# Altium PCB dc_power_module_v1.PcbDoc (part 4 of 4)
Units mm, origin at the board's own origin, x right, y up, seen from the top; angles counter-clockwise.
Board outline 83.82 x 73.41 mm, 2 copper layers (Top Layer, Bottom Layer); 37 components, 20 nets, 131 pads, 21 vias.
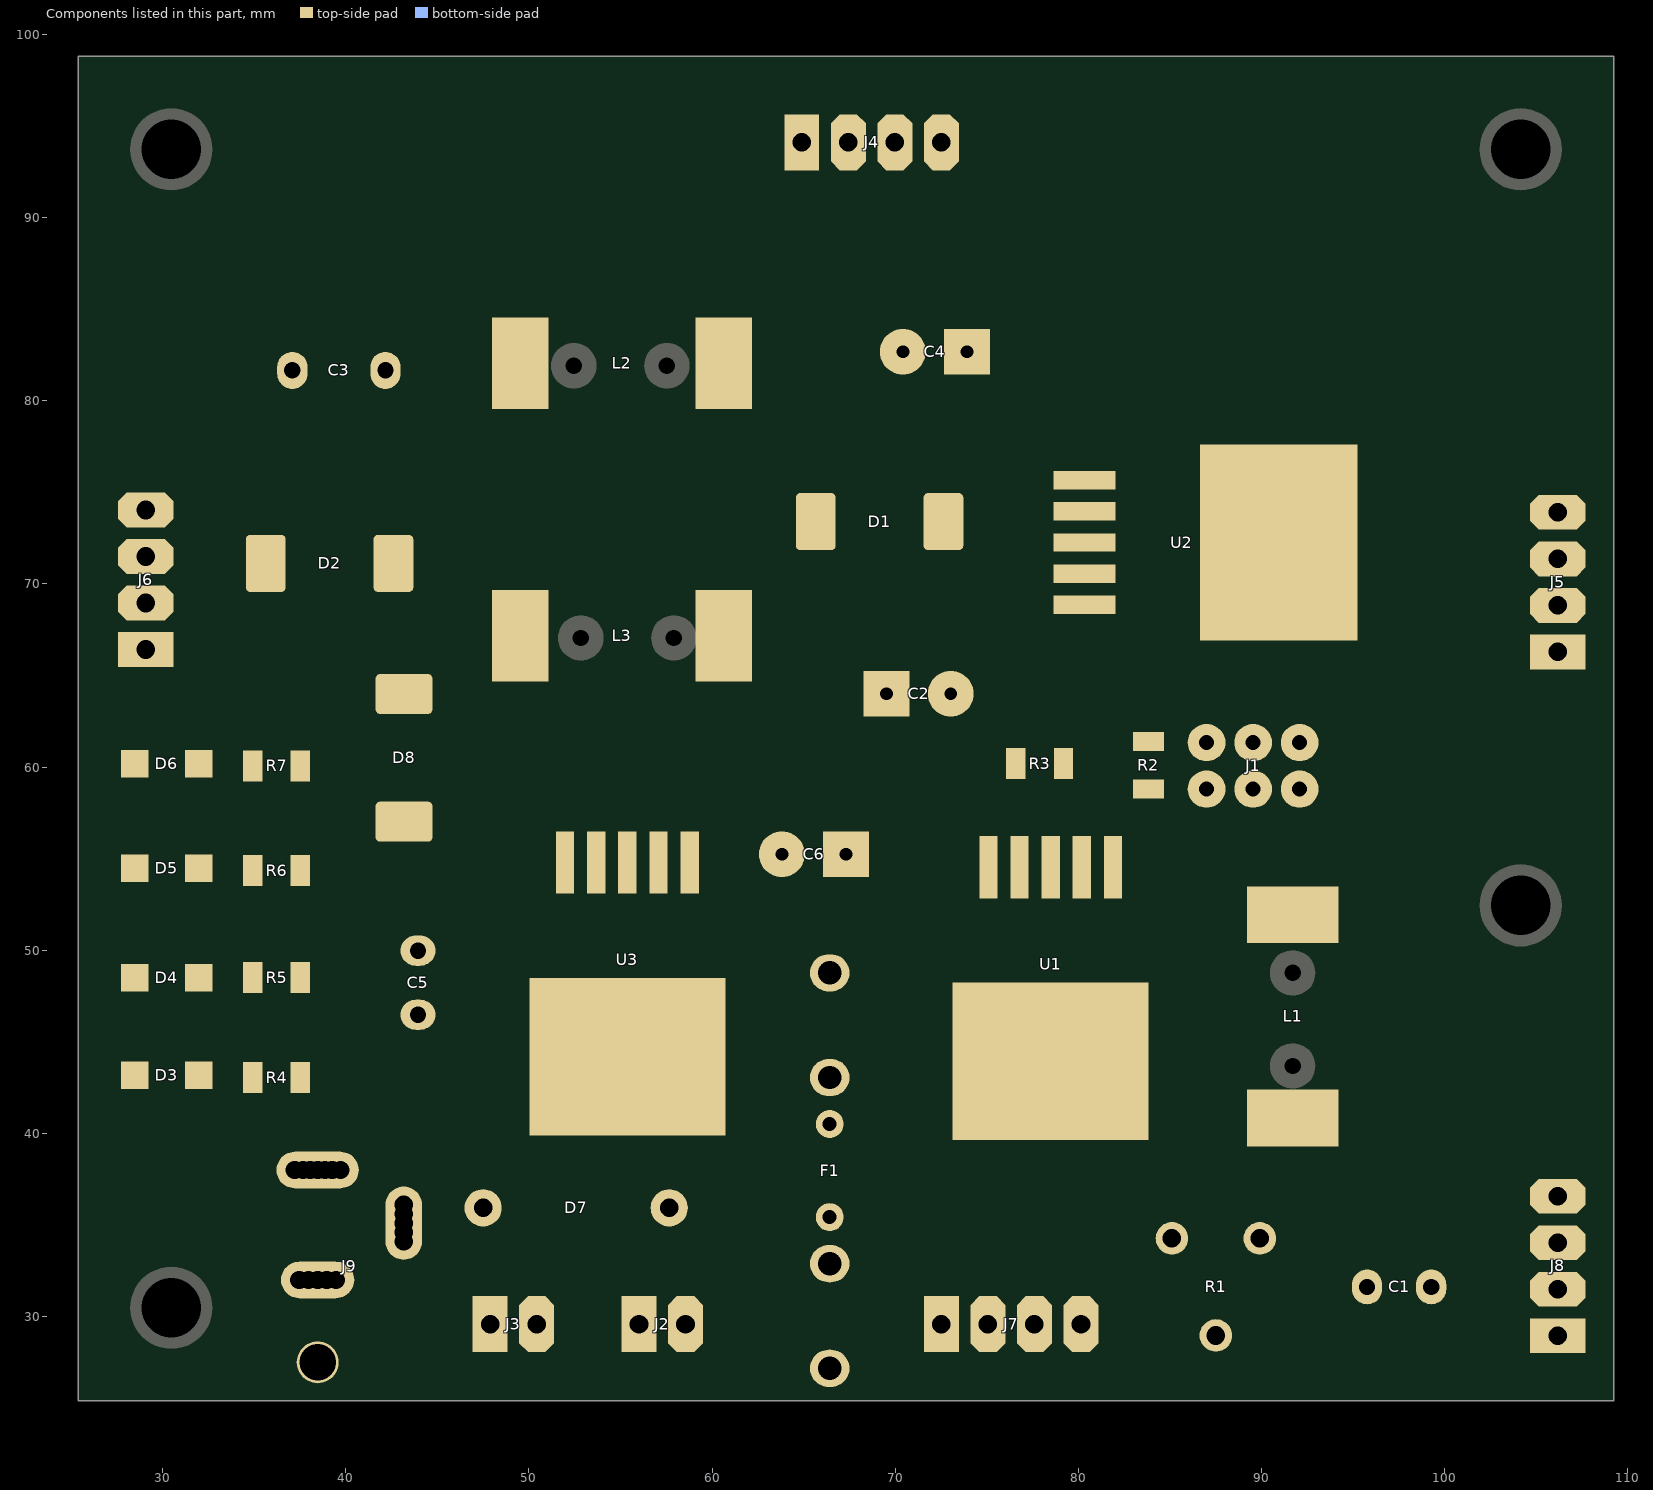
[diagram p4: the components of this part, seen from the top]

## Via types
v1: diameter 1.27, hole 0.711, Top Layer to Bottom Layer, 21 vias

## Nets (pads, with @x,y where several pads share a name; then routed paths per layer and width w, separated by ;. In a path a pad name is that pad's centre, name@x,y a point inside that pad or via, vN(x,y) a via of type N, cw(c..) or ccw(c..) an arc to the next point about the centre after c; other vN are vias at no path point) (continued)
copper on no net: (continued)
  Top Layer w0.008: 44.19,89.148 44.411,89.148 ; 44.19,90.062 44.411,90.062 ; 44.19,90.07 44.411,90.07 ; 44.19,90.077 44.411,90.077 ; 44.19,90.085 44.411,90.085 ; 44.19,90.093 44.411,90.093 ; 44.19,92.363 44.526,92.363 ; 44.19,95 44.266,95 ; 44.198,88.759 44.274,88.759 ; 44.198,89.087 44.404,89.087 ; 44.198,89.094 44.404,89.094 ; 44.198,89.102 44.404,89.102 ; 44.198,89.11 44.411,89.11 ; 44.198,89.155 44.411,89.155 ; 44.198,89.163 44.404,89.163 ; 44.198,89.171 44.404,89.171 ; 44.198,89.178 44.404,89.178 ; 44.198,90.032 44.404,90.032 ; 44.198,90.039 44.404,90.039 ; 44.198,90.047 44.404,90.047 ; 44.198,90.054 44.411,90.054 ; 44.198,90.1 44.411,90.1 ; 44.198,90.108 44.404,90.108 ; 44.198,90.115 44.404,90.115 ; 44.198,90.123 44.404,90.123 ; 44.198,95.007 44.282,95.007 ; 44.206,88.469 44.266,88.469 ; 44.206,88.477 44.266,88.477 ; 44.206,88.485 44.266,88.485 ; 44.206,88.492 44.266,88.492 ; 44.206,88.5 44.266,88.5 ; 44.206,88.729 44.266,88.729 ; 44.206,88.736 44.266,88.736 ; 44.206,88.744 44.266,88.744 ; 44.206,88.751 44.266,88.751 ; 44.206,89.079 44.396,89.079 ; 44.206,89.186 44.396,89.186 ; 44.206,89.193 44.396,89.193 ; 44.206,90.016 44.396,90.016 ; 44.206,90.024 44.396,90.024 ; 44.206,90.131 44.396,90.131 ; 44.206,92.371 44.541,92.371 ; 44.206,95.015 44.289,95.015 ; 44.213,88.508 44.266,88.508 ; 44.213,88.515 44.266,88.515 ; 44.213,88.523 44.266,88.523 ; 44.213,88.53 44.266,88.53 ; 44.213,88.538 44.266,88.538 ; 44.213,88.546 44.266,88.546 ; 44.213,88.553 44.266,88.553 ; 44.213,88.561 44.266,88.561 ; 44.213,88.569 44.266,88.569 ; 44.213,88.576 44.266,88.576 ; 44.213,88.584 44.266,88.584 ; 44.213,88.591 44.266,88.591 ; 44.213,88.599 44.266,88.599 ; 44.213,88.607 44.266,88.607 ; 44.213,88.614 44.266,88.614 ; 44.213,88.622 44.266,88.622 ; 44.213,88.629 44.266,88.629 ; 44.213,88.637 44.266,88.637 ; 44.213,88.645 44.266,88.645 ; 44.213,88.652 44.266,88.652 ; 44.213,88.66 44.266,88.66 ; 44.213,88.668 44.266,88.668 ; 44.213,88.675 44.266,88.675 ; 44.213,88.683 44.266,88.683 ; 44.213,88.69 44.266,88.69 ; 44.213,88.698 44.266,88.698 ; 44.213,88.706 44.266,88.706 ; 44.213,88.713 44.266,88.713 ; 44.213,88.721 44.266,88.721 ; 44.213,89.064 44.388,89.064 ; 44.213,89.071 44.388,89.071 ; 44.213,89.201 44.388,89.201 ; 44.213,90.009 44.388,90.009 ; 44.213,90.138 44.396,90.138 ; 44.213,90.146 44.388,90.146 ; 44.221,89.056 44.381,89.056 ; 44.221,89.209 44.381,89.209 ; 44.221,90.001 44.381,90.001 ; 44.221,90.153 44.381,90.153 ; 44.221,92.379 44.556,92.379 ; 44.221,95.023 44.297,95.023 ; 44.228,89.049 44.373,89.049 ; 44.228,89.216 44.373,89.216 ; 44.228,89.993 44.373,89.993 ; 44.228,90.161 44.373,90.161 ; 44.228,95.03 44.305,95.03 ; 44.236,89.224 44.366,89.224 ; 44.236,89.986 44.366,89.986 ; 44.236,95.038 44.312,95.038 ; 44.236,96.851 45.341,96.851 ; 44.244,89.041 44.358,89.041 ; 44.244,90.169 44.358,90.169 ; 44.244,92.386 44.571,92.386 ; 44.244,95.046 44.327,95.046 ; 44.251,89.231 44.35,89.231 ; 44.251,89.978 44.35,89.978 ; 44.251,90.176 44.35,90.176 ; 44.251,95.053 44.335,95.053 ; 44.259,89.033 44.35,89.033 ; 44.259,92.394 44.587,92.394 ; 44.259,95.061 44.343,95.061 ; 44.266,95.068 44.35,95.068 ; 44.274,89.239 44.327,89.239 ; 44.274,89.971 44.327,89.971 ; 44.274,92.401 44.602,92.401 ; 44.282,89.026 44.32,89.026 ; 44.282,90.184 44.32,90.184 ; 44.282,95.076 44.366,95.076 ; 44.282,96.844 45.356,96.844 ; 44.289,92.409 44.617,92.409 ; 44.289,95.084 44.373,95.084 ; 44.297,95.091 44.381,95.091 ; 44.305,92.417 44.625,92.417 ; 44.305,95.099 44.388,95.099 ; 44.312,95.106 44.396,95.106 ; 44.32,92.424 44.64,92.424 ; 44.32,95.114 44.411,95.114 ; 44.32,96.836 45.364,96.836 ; 44.327,95.122 44.419,95.122 ; 44.335,92.432 44.655,92.432 ; 44.343,95.129 44.427,95.129 ; 44.35,92.439 44.67,92.439 ; 44.35,95.137 44.434,95.137 ; 44.358,95.145 44.449,95.145 ; 44.358,96.829 45.379,96.829 ; 44.366,92.447 44.686,92.447 ; 44.366,95.152 44.457,95.152 ; 44.373,95.16 44.465,95.16 ; 44.381,92.455 44.701,92.455 ; 44.381,95.167 44.472,95.167 ; 44.388,92.462 44.708,92.462 ; 44.388,95.175 44.487,95.175 ; 44.396,95.183 44.495,95.183 ; 44.396,96.821 45.387,96.821 ; 44.404,92.47 44.724,92.47 ; 44.411,95.19 44.503,95.19 ; 44.419,92.478 44.739,92.478 ; 44.419,95.198 44.51,95.198 ; 44.427,95.206 44.518,95.206 ; 44.427,96.813 45.402,96.813 ; 44.434,92.485 44.747,92.485 ; 44.434,95.213 44.533,95.213 ; 44.442,95.221 44.541,95.221 ; 44.449,89.079 44.67,89.079 ; 44.449,90.131 44.67,90.131 ; 44.449,92.493 44.762,92.493 ; 44.449,95.228 44.548,95.228 ; 44.449,96.806 45.417,96.806 ; 44.457,89.041 44.663,89.041 ; 44.457,89.049 44.663,89.049 ; 44.457,89.056 44.67,89.056 ; 44.457,89.064 44.67,89.064 ; 44.457,89.071 44.67,89.071 ; 44.457,89.087 44.67,89.087 ; 44.457,89.094 44.67,89.094 ; 44.457,89.102 44.67,89.102 ; 44.457,89.11 44.67,89.11 ; 44.457,89.117 44.663,89.117 ; 44.457,89.125 44.663,89.125 ; 44.457,90.093 44.663,90.093 ; 44.457,90.1 44.67,90.1 ; 44.457,90.108 44.67,90.108 ; 44.457,90.115 44.67,90.115 ; 44.457,90.123 44.67,90.123 ; 44.457,90.138 44.67,90.138 ; 44.457,90.146 44.67,90.146 ; 44.457,90.153 44.67,90.153 ; 44.457,90.161 44.663,90.161 ; 44.457,90.169 44.663,90.169 ; 44.457,92.5 44.777,92.5 ; 44.457,95.236 44.556,95.236 ; 44.465,89.026 44.655,89.026 ; 44.465,89.033 44.663,89.033 ; 44.465,89.132 44.663,89.132 ; 44.465,90.077 44.655,90.077 ; 44.465,90.085 44.663,90.085 ; 44.465,90.176 44.663,90.176 ; 44.465,90.184 44.655,90.184 ; 44.472,89.018 44.655,89.018 ; 44.472,89.14 44.655,89.14 ; 44.472,89.148 44.647,89.148 ; 44.472,90.062 44.647,90.062 ; 44.472,90.07 44.655,90.07 ; 44.472,90.192 44.655,90.192 ; 44.472,92.508 44.785,92.508 ; 44.472,95.244 44.571,95.244 ; 44.48,89.01 44.647,89.01 ; 44.48,89.155 44.64,89.155 ; 44.48,90.054 44.64,90.054 ; 44.48,90.199 44.647,90.199 ; 44.48,95.251 44.579,95.251 ; 44.48,96.798 45.425,96.798 ; 44.487,89.003 44.64,89.003 ; 44.487,89.163 44.632,89.163 ; 44.487,90.047 44.632,90.047 ; 44.487,90.207 44.64,90.207 ; 44.487,92.516 44.8,92.516 ; 44.487,95.259 44.587,95.259 ; 44.495,88.995 44.632,88.995 ; 44.495,89.171 44.625,89.171 ; 44.495,90.039 44.625,90.039 ; 44.495,90.214 44.632,90.214 ; 44.495,92.523 44.815,92.523 ; 44.495,95.267 44.594,95.267 ; 44.503,88.988 44.617,88.988 ; 44.503,90.222 44.617,90.222 ; 44.503,95.274 44.602,95.274 ; 44.503,96.791 45.44,96.791 ; 44.51,89.178 44.617,89.178 ; 44.51,90.032 44.609,90.032 ; 44.51,92.531 44.823,92.531 ; 44.51,95.282 44.617,95.282 ; 44.518,88.98 44.602,88.98 ; 44.518,90.23 44.609,90.23 ; 44.518,95.289 44.625,95.289 ; 44.526,89.186 44.594,89.186 ; 44.526,92.539 44.838,92.539 ; 44.533,90.024 44.594,90.024 ; 44.533,92.546 44.846,92.546 ; 44.533,95.297 44.632,95.297 ; 44.533,96.783 45.448,96.783 ; 44.541,88.561 44.609,88.561 ; 44.541,88.569 44.609,88.569 ; 44.541,88.576 44.602,88.576 ; 44.541,88.584 44.602,88.584 ; 44.541,88.591 44.602,88.591 ; 44.541,88.599 44.602,88.599 ; 44.541,88.607 44.602,88.607 ; 44.541,88.614 44.602,88.614 ; 44.541,88.622 44.602,88.622 ; 44.541,88.629 44.602,88.629 ; 44.541,88.637 44.602,88.637 ; 44.541,88.645 44.609,88.645 ; 44.541,88.652 44.609,88.652 ; 44.541,95.305 44.64,95.305 ; 44.548,88.538 44.617,88.538 ; 44.548,88.546 44.609,88.546 ; 44.548,88.553 44.609,88.553 ; 44.548,88.66 44.609,88.66 ; 44.548,88.668 44.609,88.668 ; 44.548,88.675 44.609,88.675 ; 44.548,88.683 44.617,88.683 ; 44.548,90.237 44.579,90.237 ; 44.548,92.554 44.861,92.554 ; 44.548,95.312 44.655,95.312 ; 44.556,88.523 44.617,88.523 ; 44.556,88.53 44.617,88.53 ; 44.556,88.69 44.617,88.69 ; 44.556,88.698 44.617,88.698 ; 44.556,92.561 44.868,92.561 ; 44.556,95.32 44.663,95.32 ; 44.556,96.775 45.463,96.775 ; 44.564,88.508 44.632,88.508 ; 44.564,88.515 44.625,88.515 ; 44.564,88.706 44.625,88.706 ; 44.564,88.713 44.625,88.713 ; 44.564,95.327 44.67,95.327 ; 44.571,88.492 44.64,88.492 ; 44.571,88.5 44.632,88.5 ; 44.571,88.721 44.632,88.721 ; 44.571,92.569 44.884,92.569 ; 44.571,95.335 44.678,95.335 ; 44.579,88.485 44.655,88.485 ; 44.579,88.729 44.64,88.729 ; 44.579,95.343 44.693,95.343 ; 44.579,96.768 45.47,96.768 ; 44.587,88.477 44.663,88.477 ; 44.587,88.736 44.64,88.736 ; 44.587,92.577 44.891,92.577 ; 44.594,88.469 44.678,88.469 ; 44.594,88.744 44.647,88.744 ; 44.594,92.584 44.907,92.584 ; 44.594,95.35 44.701,95.35 ; 44.594,96.76 45.486,96.76 ; 44.602,88.751 44.663,88.751 ; 44.602,95.358 44.708,95.358 ; 44.609,88.759 44.678,88.759 ; 44.609,92.592 44.914,92.592 ; 44.609,95.366 44.716,95.366 ; 44.617,88.767 44.708,88.767 ; 44.617,92.6 44.929,92.6 ; 44.617,95.373 44.724,95.373 ; 44.617,96.752 45.493,96.752 ; 44.625,95.381 44.739,95.381 ; 44.632,88.774 44.792,88.774 ; 44.632,92.607 44.937,92.607 ; 44.632,95.388 44.747,95.388 ; 44.64,92.615 44.952,92.615 ; 44.64,95.396 44.754,95.396 ; 44.64,96.745 45.501,96.745 ; 44.647,88.782 44.769,88.782 ; 44.655,92.622 44.96,92.622 ; 44.655,95.404 44.762,95.404 ; 44.655,96.737 45.516,96.737 ; 44.663,92.63 44.975,92.63 ; 44.663,95.411 44.777,95.411 ; 44.67,95.419 44.785,95.419 ; 44.678,88.79 44.747,88.79 ; 44.678,92.638 44.983,92.638 ; 44.678,95.427 44.792,95.427 ; 44.678,96.73 45.524,96.73 ; 44.686,92.645 44.99,92.645 ; 44.686,95.434 44.8,95.434 ; 44.693,92.653 45.006,92.653 ; 44.693,95.442 44.808,95.442 ; 44.693,96.722 45.531,96.722 ; 44.701,95.449 44.823,95.449 ; 44.708,92.66 45.013,92.66 ; 44.716,88.98 44.838,88.98 ; 44.716,88.988 44.876,88.988 ; 44.716,88.995 44.914,88.995 ; 44.716,89.003 44.945,89.003 ; 44.716,89.01 44.968,89.01 ; 44.716,89.018 44.99,89.018 ; 44.716,89.026 45.013,89.026 ; 44.716,89.033 45.028,89.033 ; 44.716,89.041 45.051,89.041 ; 44.716,89.049 45.067,89.049 ; 44.716,89.056 45.082,89.056 ; 44.716,89.064 45.097,89.064 ; 44.716,89.071 45.112,89.071 ; 44.716,89.079 45.128,89.079 ; 44.716,89.087 45.135,89.087 ; 44.716,89.094 45.15,89.094 ; 44.716,89.102 45.166,89.102 ; 44.716,89.11 45.173,89.11 ; 44.716,89.117 45.189,89.117 ; 44.716,89.125 45.196,89.125 ; 44.716,89.132 45.204,89.132 ; 44.716,89.14 45.219,89.14 ; 44.716,89.148 45.227,89.148 ; 44.716,89.155 45.234,89.155 ; 44.716,89.163 45.242,89.163 ; 44.716,89.171 45.249,89.171 ; 44.716,89.178 45.257,89.178 ; 44.716,89.186 45.265,89.186 ; 44.716,90.024 45.272,90.024 ; 44.716,90.032 45.265,90.032 ; 44.716,90.039 45.257,90.039 ; 44.716,90.047 45.242,90.047 ; 44.716,90.054 45.234,90.054 ; 44.716,90.062 45.227,90.062 ; 44.716,90.07 45.219,90.07 ; 44.716,90.077 45.211,90.077 ; 44.716,90.085 45.196,90.085 ; 44.716,90.093 45.189,90.093 ; 44.716,90.1 45.173,90.1 ; 44.716,90.108 45.166,90.108 ; 44.716,90.115 45.15,90.115 ; 44.716,90.123 45.143,90.123 ; 44.716,90.131 45.128,90.131 ; 44.716,90.138 45.112,90.138 ; 44.716,90.146 45.097,90.146 ; 44.716,90.153 45.082,90.153 ; 44.716,90.161 45.067,90.161 ; 44.716,90.169 45.051,90.169 ; 44.716,90.176 45.036,90.176 ; 44.716,90.184 45.013,90.184 ; 44.716,90.192 44.998,90.192 ; 44.716,90.199 44.975,90.199 ; 44.716,90.207 44.952,90.207 ; 44.716,90.214 44.922,90.214 ; 44.716,90.222 44.884,90.222 ; 44.716,90.23 44.846,90.23 ; 44.716,90.237 44.769,90.237 ; 44.716,92.668 45.021,92.668 ; 44.716,95.457 44.83,95.457 ; 44.716,96.714 45.547,96.714 ; 44.724,88.767 44.83,88.767 ; 44.724,95.465 44.838,95.465 ; 44.731,92.676 45.036,92.676 ; 44.731,95.472 44.846,95.472 ; 44.731,96.707 45.554,96.707 ; 44.739,92.683 45.044,92.683 ; 44.739,95.48 44.861,95.48 ; 44.747,92.691 45.051,92.691 ; 44.747,95.487 44.868,95.487 ; 44.747,96.699 45.562,96.699 ; 44.754,88.759 44.838,88.759 ; 44.754,95.495 44.876,95.495 ; 44.762,89.193 45.272,89.193 ; 44.762,92.699 45.067,92.699 ; 44.762,95.503 44.884,95.503 ; 44.762,96.691 45.57,96.691 ; 44.769,88.469 44.808,88.469 ; 44.769,88.751 44.838,88.751 ; 44.769,92.706 45.074,92.706 ; 44.777,90.016 45.28,90.016 ; 44.777,95.51 44.899,95.51 ; 44.785,88.477 44.815,88.477 ; 44.785,88.744 44.838,88.744 ; 44.785,92.714 45.082,92.714 ; 44.785,95.518 44.907,95.518 ; 44.785,96.684 45.585,96.684 ; 44.792,88.485 44.823,88.485 ; 44.792,88.736 44.838,88.736 ; 44.792,92.721 45.097,92.721 ; 44.792,95.526 44.914,95.526 ; 44.8,88.492 44.83,88.492 ; 44.8,88.721 44.838,88.721 ; 44.8,88.729 44.838,88.729 ; 44.8,92.729 45.105,92.729 ; 44.8,95.533 44.922,95.533 ; 44.8,96.676 45.592,96.676 ; 44.808,88.5 44.838,88.5 ; 44.808,88.706 44.838,88.706 ; 44.808,88.713 44.838,88.713 ; 44.808,88.774 44.83,88.774 ; 44.808,95.541 44.929,95.541 ; 44.815,88.508 44.838,88.508 ; 44.815,88.69 44.838,88.69 ; 44.815,88.698 44.838,88.698 ; 44.815,88.782 44.83,88.782 ; 44.815,88.79 44.83,88.79 ; 44.815,89.201 45.28,89.201 ; 44.815,92.737 45.112,92.737 ; 44.815,95.548 44.945,95.548 ; 44.815,96.669 45.6,96.669 ; 44.823,88.515 44.846,88.515 ; 44.823,88.523 44.846,88.523 ; 44.823,88.675 44.838,88.675 ; 44.823,88.683 44.838,88.683 ; 44.823,92.744 45.12,92.744 ; 44.823,95.556 44.952,95.556 ; 44.83,88.53 44.838,88.53 ; 44.83,90.009 45.288,90.009 ; 44.83,92.752 45.135,92.752 ; 44.83,95.564 44.96,95.564 ; 44.83,96.661 45.608,96.661 ; 44.838,92.76 45.143,92.76 ; 44.846,95.571 44.968,95.571 ; 44.846,96.653 45.615,96.653 ; 44.853,89.209 45.288,89.209 ; 44.853,92.767 45.15,92.767 ; 44.853,95.579 44.983,95.579 ; 44.861,90.001 45.295,90.001 ; 44.861,92.775 45.158,92.775 ; 44.861,95.587 44.99,95.587 ; 44.861,96.646 45.623,96.646 ; 44.868,92.782 45.166,92.782 ; 44.868,95.594 44.998,95.594 ; 44.868,96.638 45.638,96.638 ; 44.876,95.602 45.006,95.602 ; 44.884,89.216 45.295,89.216 ; 44.884,89.993 45.303,89.993 ; 44.884,92.79 45.181,92.79 ; 44.884,95.609 45.013,95.609 ; 44.884,96.63 45.646,96.63 ; 44.891,92.798 45.189,92.798 ; 44.891,95.617 45.028,95.617 ; 44.899,92.805 45.196,92.805 ; 44.899,96.623 45.653,96.623 ; 44.907,89.224 45.303,89.224 ; 44.907,89.986 45.303,89.986 ; 44.907,92.813 45.204,92.813 ; 44.907,95.625 45.036,95.625 ; 44.914,92.82 45.211,92.82 ; 44.914,95.632 45.044,95.632 ; 44.914,96.615 45.661,96.615 ; 44.922,89.231 45.31,89.231 ; 44.922,95.64 45.051,95.64 ; 44.929,89.978 45.31,89.978 ; 44.929,92.828 45.227,92.828 ; 44.929,95.648 45.067,95.648 ; 44.929,96.608 45.669,96.608 ; 44.937,92.836 45.234,92.836 ; 44.937,95.655 45.074,95.655 ; 44.945,89.239 45.318,89.239 ; 44.945,92.843 45.242,92.843 ; 44.945,95.663 45.082,95.663 ; 44.945,96.6 45.676,96.6 ; 44.952,89.971 45.318,89.971 ; 44.952,92.851 45.249,92.851 ; 44.952,95.67 45.089,95.67 ; 44.952,96.592 45.684,96.592 ; 44.96,89.247 45.326,89.247 ; 44.96,92.859 45.257,92.859 ; 44.968,89.963 45.326,89.963 ; 44.968,95.678 45.105,95.678 ; 44.968,96.585 45.691,96.585 ; 44.975,89.254 45.326,89.254 ; 44.975,92.866 45.265,92.866 ; 44.975,95.686 45.112,95.686 ; 44.983,89.955 45.333,89.955 ; 44.983,92.874 45.272,92.874 ; 44.983,95.693 45.12,95.693 ; 44.983,96.577 45.699,96.577 ; 44.99,89.262 45.333,89.262 ; 44.99,92.881 45.28,92.881 ; 44.99,95.701 45.128,95.701 ; 44.99,96.57 45.707,96.57 ; 44.998,89.948 45.333,89.948 ; 44.998,92.889 45.288,92.889 ; 44.998,95.708 45.135,95.708 ; 45.006,89.27 45.341,89.27 ; 45.006,92.897 45.303,92.897 ; 45.006,95.716 45.15,95.716 ; 45.006,96.562 45.714,96.562 ; 45.013,89.94 45.341,89.94 ; 45.013,92.904 45.31,92.904 ; 45.013,95.724 45.158,95.724 ; 45.021,89.277 45.349,89.277 ; 45.021,89.933 45.349,89.933 ; 45.021,92.912 45.318,92.912 ; 45.021,96.554 45.722,96.554 ; 45.028,92.92 45.326,92.92 ; 45.028,95.731 45.166,95.731 ; 45.028,96.547 45.73,96.547 ; 45.036,89.285 45.349,89.285 ; 45.036,89.925 45.356,89.925 ; 45.036,92.927 45.333,92.927 ; 45.036,95.739 45.173,95.739 ; 45.044,89.292 45.356,89.292 ; 45.044,95.747 45.189,95.747 ; 45.044,96.539 45.737,96.539 ; 45.051,89.917 45.356,89.917 ; 45.051,92.935 45.341,92.935 ; 45.051,95.754 45.196,95.754 ; 45.051,96.531 45.745,96.531 ; 45.059,89.3 45.364,89.3 ; 45.059,89.91 45.364,89.91 ; 45.059,92.942 45.349,92.942 ; 45.059,95.762 45.204,95.762 ; 45.067,89.308 45.364,89.308 ; 45.067,89.902 45.371,89.902 ; 45.067,92.95 45.356,92.95 ; 45.067,95.769 45.211,95.769 ; 45.067,96.524 45.752,96.524 ; 45.074,89.315 45.371,89.315 ; 45.074,92.958 45.364,92.958 ; 45.074,95.777 45.219,95.777 ; 45.082,89.323 45.379,89.323 ; 45.082,89.894 45.371,89.894 ; 45.082,92.965 45.371,92.965 ; 45.082,96.516 45.76,96.516 ; 45.089,88.69 45.15,88.69 ; 45.089,88.698 45.143,88.698 ; 45.089,88.706 45.143,88.706 ; 45.089,89.887 45.379,89.887 ; 45.089,92.973 45.379,92.973 ; 45.089,95.785 45.234,95.785 ; 45.089,96.509 45.76,96.509 ; 45.097,88.469 45.166,88.469 ; 45.097,88.477 45.15,88.477 ; 45.097,88.485 45.143,88.485 ; 45.097,88.492 45.135,88.492 ; 45.097,88.5 45.135,88.5 ; 45.097,88.508 45.128,88.508 ; 45.097,88.515 45.12,88.515 ; 45.097,88.523 45.12,88.523 ; 45.097,88.53 45.12,88.53 ; 45.097,88.538 45.112,88.538 ; 45.097,88.546 45.112,88.546 ; 45.097,88.553 45.112,88.553 ; 45.097,88.66 45.189,88.66 ; 45.097,88.668 45.181,88.668 ; 45.097,88.675 45.166,88.675 ; 45.097,88.683 45.158,88.683 ; 45.097,88.713 45.143,88.713 ; 45.097,88.721 45.143,88.721 ; 45.097,88.729 45.143,88.729 ; 45.097,88.736 45.143,88.736 ; 45.097,89.331 45.379,89.331 ; 45.097,89.879 45.379,89.879 ; 45.097,92.981 45.387,92.981 ; 45.097,95.792 45.242,95.792 ; 45.105,88.652 45.204,88.652 ; 45.105,88.744 45.15,88.744 ; 45.105,88.751 45.158,88.751 ; 45.105,89.338 45.387,89.338 ; 45.105,89.872 45.387,89.872 ; 45.105,92.988 45.394,92.988 ; 45.105,95.8 45.249,95.8 ; 45.105,96.501 45.768,96.501 ; 45.112,88.645 45.219,88.645 ; 45.112,88.759 45.173,88.759 ; 45.112,89.346 45.387,89.346 ; 45.112,89.864 45.387,89.864 ; 45.112,92.996 45.402,92.996 ; 45.112,95.808 45.257,95.808 ; 45.112,96.493 45.775,96.493 ; 45.12,88.637 45.234,88.637 ; 45.12,88.767 45.303,88.767 ; 45.12,89.353 45.394,89.353 ; 45.12,89.856 45.394,89.856 ; 45.12,93.003 45.409,93.003 ; 45.12,95.815 45.272,95.815 ; 45.128,88.629 45.249,88.629 ; 45.128,88.774 45.265,88.774 ; 45.128,89.361 45.394,89.361 ; 45.128,89.849 45.394,89.849 ; 45.128,93.011 45.417,93.011 ; 45.128,95.823 45.28,95.823 ; 45.128,96.486 45.783,96.486 ; 45.135,88.622 45.257,88.622 ; 45.135,89.369 45.402,89.369 ; 45.135,89.841 45.402,89.841 ; 45.135,93.019 45.425,93.019 ; 45.135,95.83 45.288,95.83 ; 45.135,96.478 45.79,96.478 ; 45.143,88.782 45.249,88.782 ; 45.143,89.376 45.402,89.376 ; 45.143,89.833 45.402,89.833 ; 45.143,93.026 45.432,93.026 ; 45.143,96.47 45.798,96.47 ; 45.15,88.614 45.272,88.614 ; 45.15,89.384 45.409,89.384 ; 45.15,89.391 45.409,89.391 ; 45.15,89.826 45.409,89.826 ; 45.15,93.034 45.44,93.034 ; 45.15,95.838 45.295,95.838 ; 45.158,88.607 45.28,88.607 ; 45.158,89.399 45.409,89.399 ; 45.158,89.811 45.417,89.811 ; 45.158,89.818 45.409,89.818 ; 45.158,93.041 45.448,93.041 ; 45.158,95.846 45.31,95.846 ; 45.158,96.463 45.798,96.463 ; 45.166,88.79 45.227,88.79 ; 45.166,89.407 45.417,89.407 ; 45.166,89.803 45.417,89.803 ; 45.166,93.049 45.455,93.049 ; 45.166,95.853 45.318,95.853 ; 45.166,96.455 45.806,96.455 ; 45.173,88.599 45.288,88.599 ; 45.173,89.414 45.417,89.414 ; 45.173,89.422 45.425,89.422 ; 45.173,89.795 45.417,89.795 ; 45.173,93.057 45.463,93.057 ; 45.173,95.861 45.326,95.861 ; 45.181,88.591 45.295,88.591 ; 45.181,89.43 45.425,89.43 ; 45.181,89.78 45.425,89.78 ; 45.181,89.788 45.425,89.788 ; 45.181,93.064 45.47,93.064 ; 45.181,95.868 45.333,95.868 ; 45.181,96.448 45.813,96.448 ; 45.189,89.437 45.425,89.437 ; 45.189,89.445 45.432,89.445 ; 45.189,89.765 45.432,89.765 ; 45.189,89.772 45.425,89.772 ; 45.189,93.072 45.47,93.072 ; 45.189,93.08 45.478,93.08 ; 45.189,95.876 45.341,95.876 ; 45.189,96.44 45.821,96.44 ; 45.196,88.584 45.303,88.584 ; 45.196,89.452 45.432,89.452 ; 45.196,89.46 45.432,89.46 ; 45.196,89.75 45.432,89.75 ; 45.196,89.757 45.432,89.757 ; 45.196,93.087 45.486,93.087 ; 45.196,95.884 45.356,95.884 ; 45.196,96.432 46.027,96.432 ; 45.204,89.468 45.432,89.468 ; 45.204,89.475 45.44,89.475 ; 45.204,89.734 45.44,89.734 ; 45.204,89.742 45.432,89.742 ; 45.204,93.095 45.493,93.095 ; 45.211,88.576 45.31,88.576 ; 45.211,89.483 45.44,89.483 ; 45.211,89.491 45.44,89.491 ; 45.211,89.719 45.44,89.719 ; 45.211,89.727 45.44,89.727 ; 45.211,93.102 45.501,93.102 ; 45.211,95.891 45.364,95.891 ; 45.211,96.425 46.019,96.425 ; 45.219,88.569 45.31,88.569 ; 45.219,89.498 45.44,89.498 ; 45.219,89.506 45.44,89.506 ; 45.219,89.513 45.448,89.513 ; 45.219,89.696 45.448,89.696 ; 45.219,89.704 45.448,89.704 ; 45.219,89.712 45.44,89.712 ; 45.219,93.11 45.509,93.11 ; 45.219,95.899 45.371,95.899 ; 45.219,96.417 46.011,96.417 ; 45.227,88.759 45.303,88.759 ; 45.227,89.521 45.448,89.521 ; 45.227,89.529 45.448,89.529 ; 45.227,89.536 45.448,89.536 ; 45.227,89.544 45.448,89.544 ; 45.227,89.552 45.448,89.552 ; 45.227,89.658 45.448,89.658 ; 45.227,89.666 45.448,89.666 ; 45.227,89.673 45.448,89.673 ; 45.227,89.681 45.448,89.681 ; 45.227,89.689 45.448,89.689 ; 45.227,93.118 45.516,93.118 ; 45.227,95.907 45.379,95.907 ; 45.227,96.41 45.996,96.41 ; 45.234,88.561 45.318,88.561 ; 45.234,89.559 45.448,89.559 ; 45.234,89.567 45.448,89.567 ; 45.234,89.574 45.448,89.574 ; 45.234,89.582 45.448,89.582 ; 45.234,89.59 45.455,89.59 ; 45.234,89.597 45.455,89.597 ; 45.234,89.605 45.455,89.605 ; 45.234,89.612 45.455,89.612 ; 45.234,89.62 45.455,89.62 ; 45.234,89.628 45.455,89.628 ; 45.234,89.635 45.448,89.635 ; 45.234,89.643 45.448,89.643 ; 45.234,89.651 45.448,89.651 ; 45.234,93.125 45.524,93.125 ; 45.234,95.914 45.394,95.914 ; 45.242,88.553 45.318,88.553 ; 45.242,88.751 45.303,88.751 ; 45.242,93.133 45.531,93.133 ; 45.242,95.922 45.402,95.922 ; 45.242,96.402 45.989,96.402 ; 45.249,88.469 45.303,88.469 ; 45.249,88.744 45.303,88.744 ; 45.249,93.141 45.531,93.141 ; 45.249,95.929 45.409,95.929 ; 45.249,96.394 45.981,96.394 ; 45.257,88.477 45.31,88.477 ; 45.257,88.538 45.318,88.538 ; 45.257,88.546 45.318,88.546 ; 45.257,88.736 45.303,88.736 ; 45.257,93.148 45.539,93.148 ; 45.257,93.156 45.547,93.156 ; 45.257,95.937 45.417,95.937 ; 45.257,96.387 45.973,96.387 ; 45.265,88.485 45.31,88.485 ; 45.265,88.492 45.318,88.492 ; 45.265,88.523 45.318,88.523 ; 45.265,88.53 45.318,88.53 ; 45.265,88.721 45.303,88.721 ; 45.265,88.729 45.303,88.729 ; 45.265,93.163 45.554,93.163 ; 45.265,95.945 45.425,95.945 ; 45.272,88.5 45.318,88.5 ; 45.272,88.508 45.318,88.508 ; 45.272,88.515 45.318,88.515 ; 45.272,88.706 45.303,88.706 ; 45.272,88.713 45.303,88.713 ; 45.272,88.774 45.303,88.774 ; 45.272,93.171 45.562,93.171 ; 45.272,96.379 45.958,96.379 ; 45.28,88.675 45.303,88.675 ; 45.28,88.683 45.303,88.683 ; 45.28,88.69 45.303,88.69 ; 45.28,88.698 45.303,88.698 ; 45.28,88.782 45.303,88.782 ; 45.28,88.79 45.303,88.79 ; 45.28,93.179 45.57,93.179 ; 45.28,95.952 45.44,95.952 ; 45.28,96.371 45.951,96.371 ; 45.288,93.186 45.577,93.186 ; 45.288,95.96 45.448,95.96 ; 45.288,96.364 45.943,96.364 ; 45.295,93.194 45.577,93.194 ; 45.295,93.201 45.585,93.201 ; 45.295,95.968 45.455,95.968 ; 45.295,96.356 45.935,96.356 ; 45.303,93.209 45.592,93.209 ; 45.303,95.975 45.463,95.975 ; 45.303,96.349 45.928,96.349 ; 45.31,93.217 45.6,93.217 ; 45.31,95.983 45.478,95.983 ; 45.318,93.224 45.608,93.224 ; 45.318,95.99 45.486,95.99 ; 45.318,96.341 45.912,96.341 ; 45.326,93.232 45.608,93.232 ; 45.326,93.24 45.615,93.24 ; 45.326,95.998 45.493,95.998 ; 45.326,96.333 45.905,96.333 ; 45.333,93.247 45.623,93.247 ; 45.333,96.326 45.897,96.326 ; 45.341,93.255 45.63,93.255 ; 45.341,96.006 45.501,96.006 ; 45.341,96.318 45.905,96.318 ; 45.349,93.262 45.638,93.262 ; 45.349,96.013 45.516,96.013 ; 45.349,96.31 45.905,96.31 ; 45.356,93.27 45.638,93.27 ; 45.356,93.278 45.646,93.278 ; 45.356,96.021 45.524,96.021 ; 45.356,96.303 45.912,96.303 ; 45.364,93.285 45.653,93.285 ; 45.364,96.029 45.531,96.029 ; 45.364,96.295 45.92,96.295 ; 45.371,93.293 45.661,93.293 ; 45.371,96.036 45.539,96.036 ; 45.371,96.288 45.92,96.288 ; 45.379,93.301 45.661,93.301 ; 45.379,93.308 45.669,93.308 ; 45.379,96.044 45.547,96.044 ; 45.387,93.316 45.676,93.316 ; 45.387,96.051 45.562,96.051 ; 45.387,96.28 45.928,96.28 ; 45.394,93.323 45.684,93.323 ; 45.394,96.272 45.928,96.272 ; 45.402,93.331 45.684,93.331 ; 45.402,93.339 45.691,93.339 ; 45.402,96.059 45.57,96.059 ; 45.402,96.265 45.935,96.265 ; 45.409,93.346 45.699,93.346 ; 45.409,96.067 46.05,96.067 ; 45.409,96.257 45.943,96.257 ; 45.417,93.354 45.707,93.354 ; 45.417,96.074 46.042,96.074 ; 45.417,96.249 45.943,96.249 ; 45.425,93.362 45.707,93.362 ; 45.425,93.369 45.714,93.369 ; 45.425,96.082 46.042,96.082 ; 45.425,96.242 45.951,96.242 ; 45.432,93.377 45.722,93.377 ; 45.432,96.089 46.034,96.089 ; 45.432,96.234 45.951,96.234 ; 45.44,93.384 45.722,93.384 ; 45.44,93.392 45.73,93.392 ; 45.44,96.097 46.034,96.097 ; 45.44,96.227 45.958,96.227 ; 45.448,93.4 45.737,93.4 ; 45.448,96.105 46.027,96.105 ; 45.448,96.219 45.966,96.219 ; 45.455,93.407 45.737,93.407 ; 45.455,93.415 45.745,93.415 ; 45.455,96.211 45.966,96.211 ; 45.463,93.422 45.752,93.422 ; 45.463,96.112 46.027,96.112 ; 45.463,96.196 45.973,96.196 ; 45.463,96.204 45.973,96.204 ; 45.47,93.43 45.76,93.43 ; 45.47,93.438 45.76,93.438 ; 45.47,96.12 46.019,96.12 ; 45.47,96.189 45.981,96.189 ; 45.478,93.445 45.768,93.445 ; 45.478,96.128 46.011,96.128 ; 45.478,96.181 45.989,96.181 ; 45.486,93.453 45.775,93.453 ; 45.486,93.461 45.775,93.461 ; 45.486,96.135 46.011,96.135 ; 45.486,96.173 45.989,96.173 ; 45.493,93.468 45.783,93.468 ; 45.493,96.143 46.004,96.143 ; 45.493,96.166 45.996,96.166 ; 45.501,93.476 45.783,93.476 ; 45.501,93.483 45.79,93.483 ; 45.501,96.15 46.004,96.15 ; 45.501,96.158 45.996,96.158 ; 45.509,93.491 45.798,93.491 ; 45.516,93.499 45.798,93.499 ; 45.516,93.506 45.806,93.506 ; 45.524,93.514 45.813,93.514 ; 45.524,93.522 45.813,93.522 ; 45.531,93.529 45.821,93.529 ; 45.539,93.537 45.829,93.537 ; 45.539,93.544 45.829,93.544 ; 45.547,93.552 45.836,93.552 ; 45.547,93.56 45.836,93.56 ; 45.554,93.567 45.844,93.567 ; 45.562,93.575 45.851,93.575 ; 45.562,93.582 45.851,93.582 ; 45.57,93.59 45.859,93.59 ; 45.57,93.598 45.859,93.598 ; 45.577,93.605 45.867,93.605 ; 45.577,93.613 45.874,93.613 ; 45.577,96.059 46.05,96.059 ; 45.585,93.621 45.874,93.621 ; 45.585,96.051 46.057,96.051 ; 45.592,93.628 45.882,93.628 ; 45.592,93.636 45.882,93.636 ; 45.592,96.044 46.057,96.044 ; 45.6,93.643 45.89,93.643 ; 45.6,93.651 45.89,93.651 ; 45.6,96.029 46.065,96.029 ; 45.6,96.036 46.065,96.036 ; 45.608,93.659 45.897,93.659 ; 45.608,93.666 45.905,93.666 ; 45.608,96.021 46.072,96.021 ; 45.615,93.674 45.905,93.674 ; 45.615,93.682 45.912,93.682 ; 45.615,96.013 46.072,96.013 ; 45.623,93.689 45.912,93.689 ; 45.623,93.697 45.92,93.697 ; 45.623,95.998 46.08,95.998 ; 45.623,96.006 46.08,96.006 ; 45.63,93.704 45.92,93.704 ; 45.63,93.712 45.928,93.712 ; 45.63,95.99 46.088,95.99 ; 45.638,93.72 45.928,93.72 ; 45.638,93.727 45.935,93.727 ; 45.638,95.975 46.095,95.975 ; 45.638,95.983 46.088,95.983 ; 45.646,93.735 45.943,93.735 ; 45.646,93.743 45.943,93.743 ; 45.646,95.96 46.103,95.96 ; 45.646,95.968 46.095,95.968 ; 45.653,93.75 45.951,93.75 ; 45.653,93.758 45.951,93.758 ; 45.653,95.952 46.103,95.952 ; 45.661,93.765 45.958,93.765 ; 45.661,93.773 45.958,93.773 ; 45.661,95.937 46.111,95.937 ; 45.661,95.945 46.111,95.945 ; 45.669,93.781 45.966,93.781 ; 45.669,93.788 45.966,93.788 ; 45.669,95.929 46.118,95.929 ; 45.676,93.796 45.973,93.796 ; 45.676,93.803 45.973,93.803 ; 45.676,95.914 46.118,95.914 ; 45.676,95.922 46.118,95.922 ; 45.684,93.811 45.981,93.811 ; 45.684,93.819 45.981,93.819 ; 45.684,95.899 46.126,95.899 ; 45.684,95.907 46.126,95.907 ; 45.691,93.826 45.989,93.826 ; 45.691,93.834 45.989,93.834 ; 45.691,93.842 45.996,93.842 ; 45.691,95.891 46.133,95.891 ; 45.699,93.849 45.996,93.849 ; 45.699,93.857 46.004,93.857 ; 45.699,95.876 46.133,95.876 ; 45.699,95.884 46.133,95.884 ; 45.707,93.864 46.004,93.864 ; 45.707,93.872 46.011,93.872 ; 45.707,95.861 46.141,95.861 ; 45.707,95.868 46.141,95.868 ; 45.714,93.88 46.011,93.88 ; 45.714,93.887 46.019,93.887 ; 45.714,95.846 46.149,95.846 ; 45.714,95.853 46.149,95.853 ; 45.722,93.895 46.019,93.895 ; 45.722,93.903 46.027,93.903 ; 45.722,93.91 46.027,93.91 ; 45.722,95.83 46.156,95.83 ; 45.722,95.838 46.149,95.838 ; 45.73,93.918 46.034,93.918 ; 45.73,93.925 46.034,93.925 ; 45.73,95.815 46.156,95.815 ; 45.73,95.823 46.156,95.823 ; 45.737,93.933 46.034,93.933 ; 45.737,93.941 46.042,93.941 ; 45.737,93.948 46.042,93.948 ; 45.737,95.8 46.164,95.8 ; 45.737,95.808 46.164,95.808 ; 45.745,93.956 46.05,93.956 ; 45.745,93.963 46.05,93.963 ; 45.745,95.785 46.171,95.785 ; 45.745,95.792 46.164,95.792 ; 45.752,93.971 46.057,93.971 ; 45.752,93.979 46.057,93.979 ; 45.752,93.986 46.065,93.986 ; 45.752,95.769 46.171,95.769 ; 45.752,95.777 46.171,95.777 ; 45.76,93.994 46.065,93.994 ; 45.76,94.002 46.072,94.002 ; 45.76,94.009 46.072,94.009 ; 45.76,95.754 46.179,95.754 ; 45.76,95.762 46.179,95.762 ; 45.768,94.017 46.072,94.017 ; 45.768,94.024 46.08,94.024 ; 45.768,94.032 46.08,94.032 ; 45.768,95.739 46.187,95.739 ; 45.768,95.747 46.179,95.747 ; 45.775,94.04 46.088,94.04 ; 45.775,94.047 46.088,94.047 ; 45.775,95.716 46.187,95.716 ; 45.775,95.724 46.187,95.724 ; 45.775,95.731 46.187,95.731 ; 45.783,94.055 46.095,94.055 ; 45.783,94.063 46.095,94.063 ; 45.783,94.07 46.095,94.07 ; 45.783,95.701 46.194,95.701 ; 45.783,95.708 46.194,95.708 ; 45.79,94.078 46.103,94.078 ; 45.79,94.085 46.103,94.085 ; 45.79,94.093 46.111,94.093 ; 45.79,95.678 46.194,95.678 ; 45.79,95.686 46.194,95.686 ; 45.79,95.693 46.194,95.693 ; 45.798,94.101 46.111,94.101 ; 45.798,94.108 46.118,94.108 ; 45.798,94.116 46.118,94.116 ; 45.798,95.663 46.202,95.663 ; 45.798,95.67 46.202,95.67 ; 45.806,94.124 46.118,94.124 ; 45.806,94.131 46.126,94.131 ; 45.806,94.139 46.126,94.139 ; 45.806,94.146 46.126,94.146 ; 45.806,95.64 46.21,95.64 ; 45.806,95.648 46.202,95.648 ; 45.806,95.655 46.202,95.655 ; 45.813,94.154 46.133,94.154 ; 45.813,94.162 46.133,94.162 ; 45.813,94.169 46.133,94.169 ; 45.813,95.617 46.21,95.617 ; 45.813,95.625 46.21,95.625 ; 45.813,95.632 46.21,95.632 ; 45.821,94.177 46.141,94.177 ; 45.821,94.184 46.141,94.184 ; 45.821,94.192 46.141,94.192 ; 45.821,95.602 46.217,95.602 ; 45.821,95.609 46.21,95.609 ; 45.829,94.2 46.149,94.2 ; 45.829,94.207 46.149,94.207 ; 45.829,94.215 46.149,94.215 ; 45.829,94.223 46.156,94.223 ; 45.829,95.579 46.217,95.579 ; 45.829,95.587 46.217,95.587 ; 45.829,95.594 46.217,95.594 ; 45.836,94.23 46.156,94.23 ; 45.836,94.238 46.156,94.238 ; 45.836,94.245 46.156,94.245 ; 45.836,94.253 46.164,94.253 ; 45.836,95.556 46.225,95.556 ; 45.836,95.564 46.225,95.564 ; 45.836,95.571 46.217,95.571 ; 45.836,96.44 46.034,96.44 ; 45.844,94.261 46.164,94.261 ; 45.844,94.268 46.164,94.268 ; 45.844,94.276 46.171,94.276 ; 45.844,94.284 46.171,94.284 ; 45.844,95.526 46.225,95.526 ; 45.844,95.533 46.225,95.533 ; 45.844,95.541 46.225,95.541 ; 45.844,95.548 46.225,95.548 ; 45.844,96.448 46.042,96.448 ; 45.851,94.291 46.171,94.291 ; 45.851,94.299 46.171,94.299 ; 45.851,94.306 46.179,94.306 ; 45.851,94.314 46.179,94.314 ; 45.851,95.503 46.232,95.503 ; 45.851,95.51 46.232,95.51 ; 45.851,95.518 46.232,95.518 ; 45.851,96.455 46.057,96.455 ; 45.859,94.322 46.179,94.322 ; 45.859,94.329 46.179,94.329 ; 45.859,94.337 46.187,94.337 ; 45.859,94.344 46.187,94.344 ; 45.859,95.472 46.24,95.472 ; 45.859,95.48 46.232,95.48 ; 45.859,95.487 46.232,95.487 ; 45.859,95.495 46.232,95.495 ; 45.859,96.463 46.065,96.463 ; 45.867,94.352 46.187,94.352 ; 45.867,94.36 46.187,94.36 ; 45.867,94.367 46.194,94.367 ; 45.867,94.375 46.194,94.375 ; 45.867,94.383 46.194,94.383 ; 45.867,95.449 46.24,95.449 ; 45.867,95.457 46.24,95.457 ; 45.867,95.465 46.24,95.465 ; 45.867,96.47 46.072,96.47 ; 45.874,94.39 46.194,94.39 ; 45.874,94.398 46.202,94.398 ; 45.874,94.405 46.202,94.405 ; 45.874,94.413 46.202,94.413 ; 45.874,94.421 46.202,94.421 ; 45.874,95.411 46.248,95.411 ; 45.874,95.419 46.248,95.419 ; 45.874,95.427 46.248,95.427 ; 45.874,95.434 46.24,95.434 ; 45.874,95.442 46.24,95.442 ; 45.874,96.478 46.08,96.478 ; 45.882,94.428 46.202,94.428 ; 45.882,94.436 46.21,94.436 ; 45.882,94.444 46.21,94.444 ; 45.882,94.451 46.21,94.451 ; 45.882,94.459 46.21,94.459 ; 45.882,95.373 46.248,95.373 ; 45.882,95.381 46.248,95.381 ; 45.882,95.388 46.248,95.388 ; 45.882,95.396 46.248,95.396 ; 45.882,95.404 46.248,95.404 ; 45.882,96.486 46.095,96.486 ; 45.89,94.466 46.217,94.466 ; 45.89,94.474 46.217,94.474 ; 45.89,94.482 46.217,94.482 ; 45.89,94.489 46.217,94.489 ; 45.89,94.497 46.217,94.497 ; 45.89,94.505 46.225,94.505 ; 45.89,95.335 46.255,95.335 ; 45.89,95.343 46.255,95.343 ; 45.89,95.35 46.255,95.35 ; 45.89,95.358 46.255,95.358 ; 45.89,95.366 46.255,95.366 ; 45.897,94.512 46.225,94.512 ; 45.897,94.52 46.225,94.52 ; 45.897,94.527 46.225,94.527 ; 45.897,94.535 46.225,94.535 ; 45.897,94.543 46.225,94.543 ; 45.897,94.55 46.232,94.55 ; 45.897,94.558 46.232,94.558 ; 45.897,95.282 46.263,95.282 ; 45.897,95.289 46.263,95.289 ; 45.897,95.297 46.255,95.297 ; 45.897,95.305 46.255,95.305 ; 45.897,95.312 46.255,95.312 ; 45.897,95.32 46.255,95.32 ; 45.897,95.327 46.255,95.327 ; 45.897,96.493 46.103,96.493 ; 45.897,96.76 46.431,96.76 ; 45.905,94.565 46.232,94.565 ; 45.905,94.573 46.232,94.573 ; 45.905,94.581 46.232,94.581 ; 45.905,94.588 46.232,94.588 ; 45.905,94.596 46.24,94.596 ; 45.905,94.604 46.24,94.604 ; 45.905,94.611 46.24,94.611 ; 45.905,95.228 46.263,95.228 ; 45.905,95.236 46.263,95.236 ; 45.905,95.244 46.263,95.244 ; 45.905,95.251 46.263,95.251 ; 45.905,95.259 46.263,95.259 ; 45.905,95.267 46.263,95.267 ; 45.905,95.274 46.263,95.274 ; 45.905,96.501 46.111,96.501 ; 45.912,94.619 46.24,94.619 ; 45.912,94.626 46.24,94.626 ; 45.912,94.634 46.24,94.634 ; 45.912,94.642 46.24,94.642 ; 45.912,94.649 46.248,94.649 ; 45.912,94.657 46.248,94.657 ; 45.912,94.665 46.248,94.665 ; 45.912,94.672 46.248,94.672 ; 45.912,94.68 46.248,94.68 ; 45.912,94.687 46.248,94.687 ; 45.912,95.152 46.271,95.152 ; 45.912,95.16 46.271,95.16 ; 45.912,95.167 46.271,95.167 ; 45.912,95.175 46.271,95.175 ; 45.912,95.183 46.271,95.183 ; 45.912,95.19 46.271,95.19 ; 45.912,95.198 46.263,95.198 ; 45.912,95.206 46.263,95.206 ; 45.912,95.213 46.263,95.213 ; 45.912,95.221 46.263,95.221 ; 45.912,96.509 46.118,96.509 ; 45.912,96.752 46.423,96.752 ; 45.912,96.768 46.438,96.768 ; 45.92,94.695 46.248,94.695 ; 45.92,94.703 46.255,94.703 ; 45.92,94.71 46.255,94.71 ; 45.92,94.718 46.255,94.718 ; 45.92,94.725 46.255,94.725 ; 45.92,94.733 46.255,94.733 ; 45.92,94.741 46.255,94.741 ; 45.92,94.748 46.255,94.748 ; 45.92,94.756 46.255,94.756 ; 45.92,94.764 46.255,94.764 ; 45.92,94.771 46.255,94.771 ; 45.92,94.779 46.263,94.779 ; 45.92,94.786 46.263,94.786 ; 45.92,94.794 46.263,94.794 ; 45.92,94.802 46.263,94.802 ; 45.92,95.038 46.271,95.038 ; 45.92,95.046 46.271,95.046 ; 45.92,95.053 46.271,95.053 ; 45.92,95.061 46.271,95.061 ; 45.92,95.068 46.271,95.068 ; 45.92,95.076 46.271,95.076 ; 45.92,95.084 46.271,95.084 ; 45.92,95.091 46.271,95.091 ; 45.92,95.099 46.271,95.099 ; 45.92,95.106 46.271,95.106 ; 45.92,95.114 46.271,95.114 ; 45.92,95.122 46.271,95.122 ; 45.92,95.129 46.271,95.129 ; 45.92,95.137 46.271,95.137 ; 45.92,95.145 46.271,95.145 ; 45.92,96.516 46.133,96.516 ; 45.928,94.809 46.263,94.809 ; 45.928,94.817 46.263,94.817 ; 45.928,94.825 46.263,94.825 ; 45.928,94.832 46.263,94.832 ; 45.928,94.84 46.263,94.84 ; 45.928,94.847 46.263,94.847 ; 45.928,94.855 46.263,94.855 ; 45.928,94.863 46.263,94.863 ; 45.928,94.87 46.263,94.87 ; 45.928,94.878 46.271,94.878 ; 45.928,94.886 46.271,94.886 ; 45.928,94.893 46.271,94.893 ; 45.928,94.901 46.271,94.901 ; 45.928,94.908 46.271,94.908 ; 45.928,94.916 46.271,94.916 ; 45.928,94.924 46.271,94.924 ; 45.928,94.931 46.271,94.931 ; 45.928,94.939 46.271,94.939 ; 45.928,94.946 46.271,94.946 ; 45.928,94.954 46.271,94.954 ; 45.928,94.962 46.271,94.962 ; 45.928,94.969 46.271,94.969 ; 45.928,94.977 46.271,94.977 ; 45.928,94.985 46.271,94.985 ; 45.928,94.992 46.271,94.992 ; 45.928,95 46.271,95 ; 45.928,95.007 46.271,95.007 ; 45.928,95.015 46.271,95.015 ; 45.928,95.023 46.271,95.023 ; 45.928,95.03 46.271,95.03 ; 45.928,96.524 46.141,96.524 ; 45.935,96.531 46.149,96.531 ; 45.935,96.775 46.446,96.775 ; 45.943,96.539 46.156,96.539 ; 45.951,96.745 46.408,96.745 ; 45.958,96.547 46.164,96.547 ; 45.958,96.783 46.453,96.783 ; 45.966,96.554 46.179,96.554 ; 45.973,96.562 46.187,96.562 ; 45.981,96.57 46.194,96.57 ; 45.981,96.737 46.4,96.737 ; 45.981,96.791 46.469,96.791 ; 45.989,96.577 46.202,96.577 ; 45.996,96.585 46.217,96.585 ; 46.004,96.592 46.225,96.592 ; 46.004,96.798 46.476,96.798 ; 46.019,96.6 46.232,96.6 ; 46.019,96.73 46.392,96.73 ; 46.027,96.608 46.24,96.608 ; 46.027,96.806 46.484,96.806 ; 46.034,96.615 46.248,96.615 ; 46.042,96.623 46.263,96.623 ; 46.05,96.63 46.271,96.63 ; 46.05,96.722 46.385,96.722 ; 46.05,96.813 46.492,96.813 ; 46.057,96.638 46.278,96.638 ; 46.065,96.646 46.286,96.646 ; 46.072,96.653 46.301,96.653 ; 46.072,96.821 46.507,96.821 ; 46.08,96.714 46.37,96.714 ; 46.088,96.661 46.309,96.661 ; 46.095,96.669 46.316,96.669 ; 46.095,96.829 46.514,96.829 ; 46.103,96.676 46.324,96.676 ; 46.111,96.684 46.339,96.684 ; 46.118,96.691 46.347,96.691 ; 46.118,96.707 46.362,96.707 ; 46.118,96.836 46.522,96.836 ; 46.126,96.699 46.354,96.699 ; 46.141,96.844 46.53,96.844 ; 46.164,96.851 46.545,96.851 ; 46.187,96.859 46.552,96.859 ; 46.217,96.867 46.56,96.867 ; 46.24,96.874 46.568,96.874 ; 46.263,96.882 46.575,96.882 ; 46.286,96.89 46.591,96.89 ; 46.309,96.897 46.598,96.897 ; 46.332,96.905 46.606,96.905 ; 46.354,96.912 46.613,96.912 ; 46.377,96.92 46.629,96.92 ; 46.4,96.928 46.636,96.928 ; 46.423,96.935 46.644,96.935 ; 46.446,96.943 46.652,96.943 ; 46.469,96.951 46.659,96.951 ; 46.492,96.958 46.674,96.958 ; 46.514,96.966 46.682,96.966 ; 46.537,96.973 46.69,96.973 ; 46.56,96.981 46.697,96.981 ; 46.591,96.989 46.713,96.989 ; 46.613,96.996 46.72,96.996 ; 46.636,97.004 46.728,97.004 ; 46.659,97.011 46.735,97.011 ; 46.682,97.019 46.751,97.019 ; 46.705,97.027 46.758,97.027 ; 46.728,97.034 46.766,97.034 ; 46.751,97.042 46.773,97.042
  Top Layer w0.254: 48.133,94.234 48.133,97.282 62.103,97.282 62.103,94.234 48.133,94.234

## Other copper
Top Layer:
  rectangle net VADJ: 99.568,63.373 107.696,67.437
  rectangle net GND: 26.67,35.052 29.591,62.484
  text "+3.3V" at 73.279,96.288 h2.54
  text "Ario Electronics" at 85.344,95.907 h2.54
  text "A-Debug Lab" at 48.895,95.248 h2.54
  text "Power Module" at 87.757,93.617 h2.03
  text "V1.0.0" at 28.934,82.042 h2.54 r90
  text "ariopulse.com" at 93.097,82.042 h1.78 r90
  text "22-Nov-2021" at 30.721,81.407 h1.52 r90
  text "+5V" at 26.924,77.238 h2.54
  text "Adjustable" at 106.682,76.708 h2.54 r90
  text ";-)" at 104.264,60.96 h5.08 r270
  text "+12v" at 106.807,41.021 h2.54 r90
  text "GND" at 71.628,33.042 h2.54
Bottom Layer:
  rectangle net GND: 70.993,27.305 81.661,31.623
  text "ariopulse.com" at 100.356,76.073 h2.54 r90

## Silkscreen, mask and mechanical layers (free items; w line width, h text height)
Mechanical 1:
  the board outline again, w0.254